# Altium PCB ui_layout-v1.1.PcbDoc
Units mil, origin at the board's own origin, x right, y up, seen from the top; angles counter-clockwise.
Board outline 3110 x 2130 mil, 4 copper layers (Power Plane, Signal Layer 1, Signal Layer 2, GND Plane), stack 63.189 mil thick; 56 components, 45 nets, 174 pads, 67 vias.
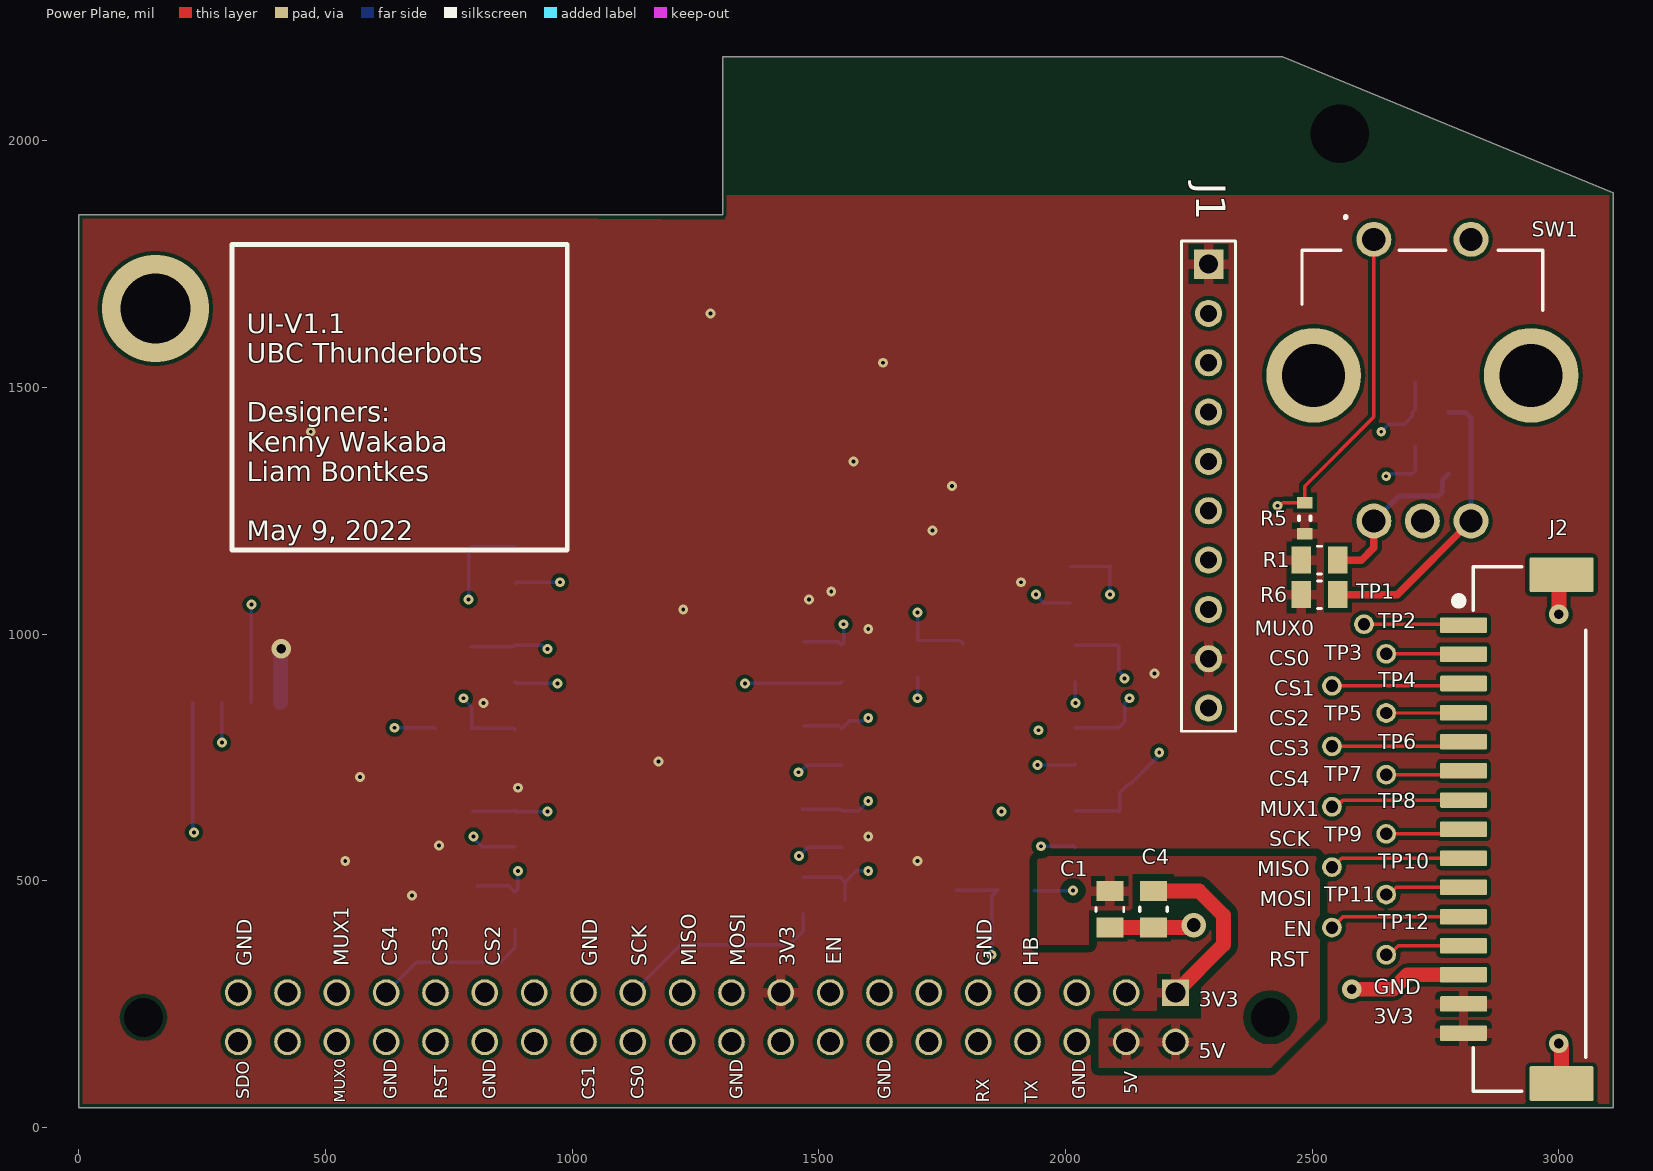
[diagram p0: Power Plane view]
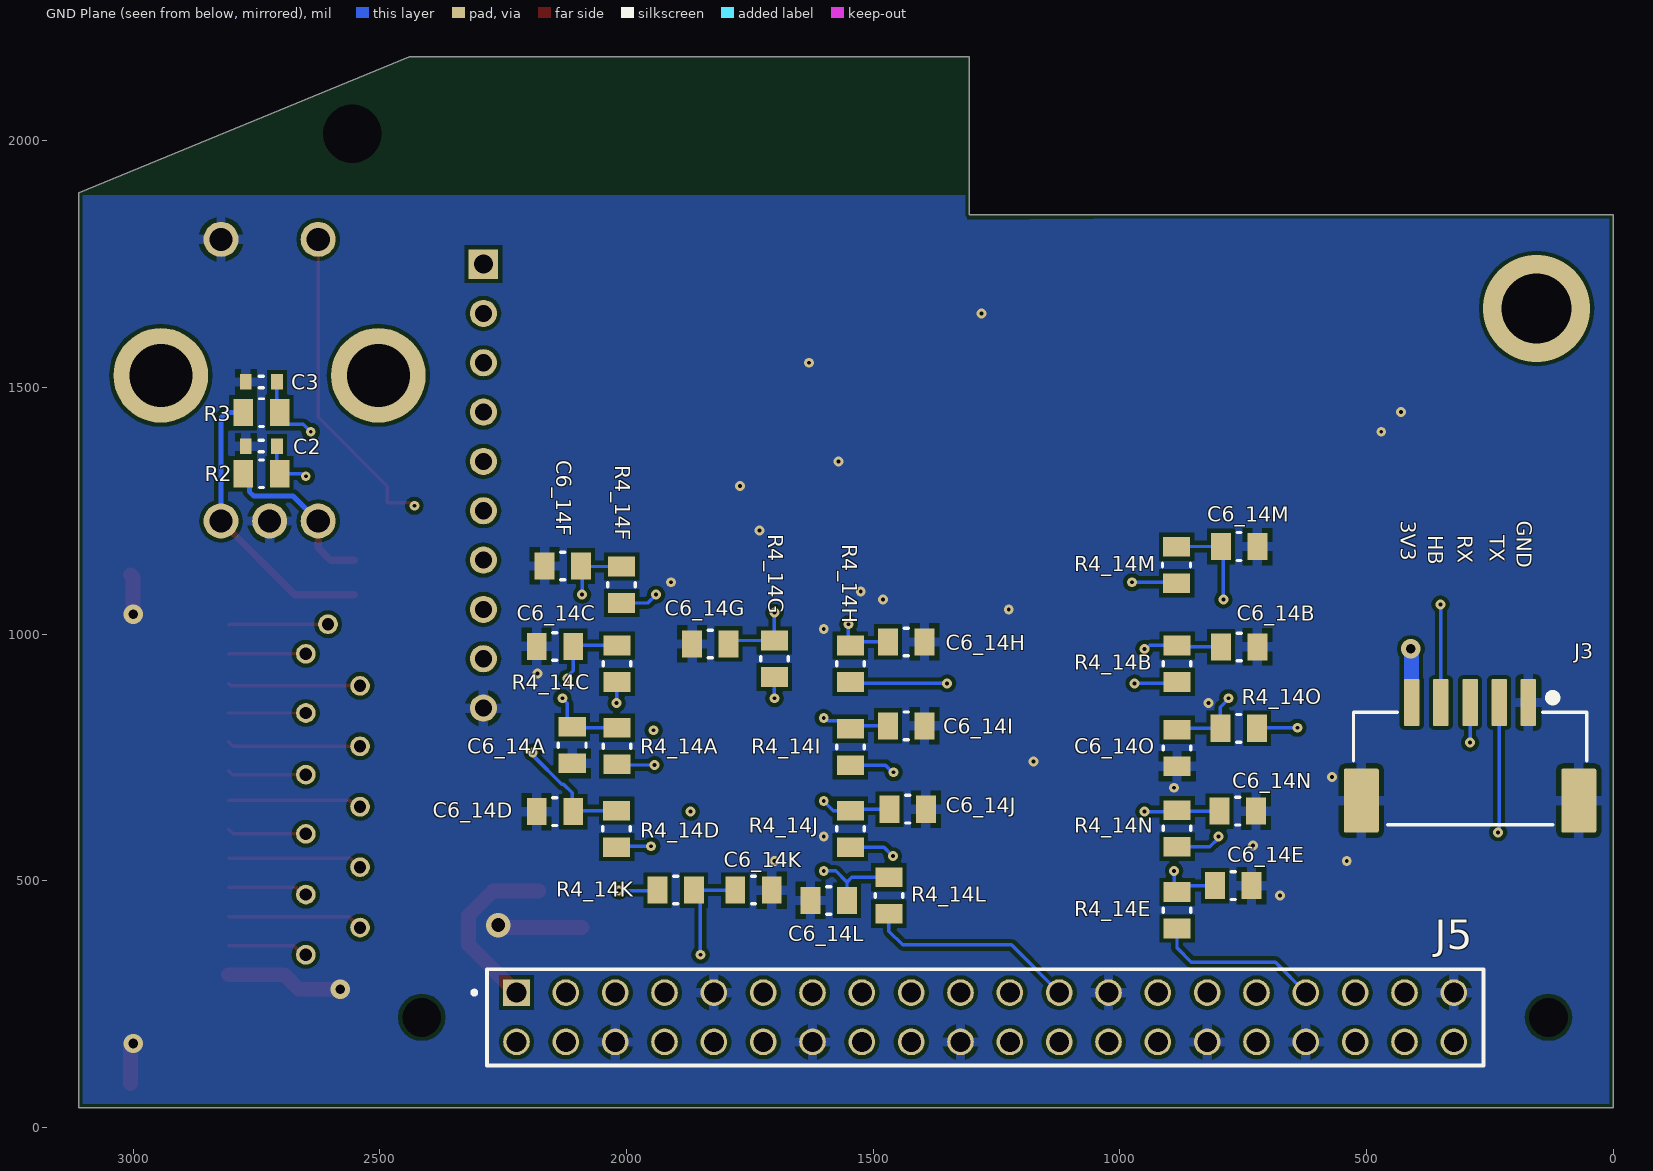
[diagram p1: GND Plane view, seen from below]
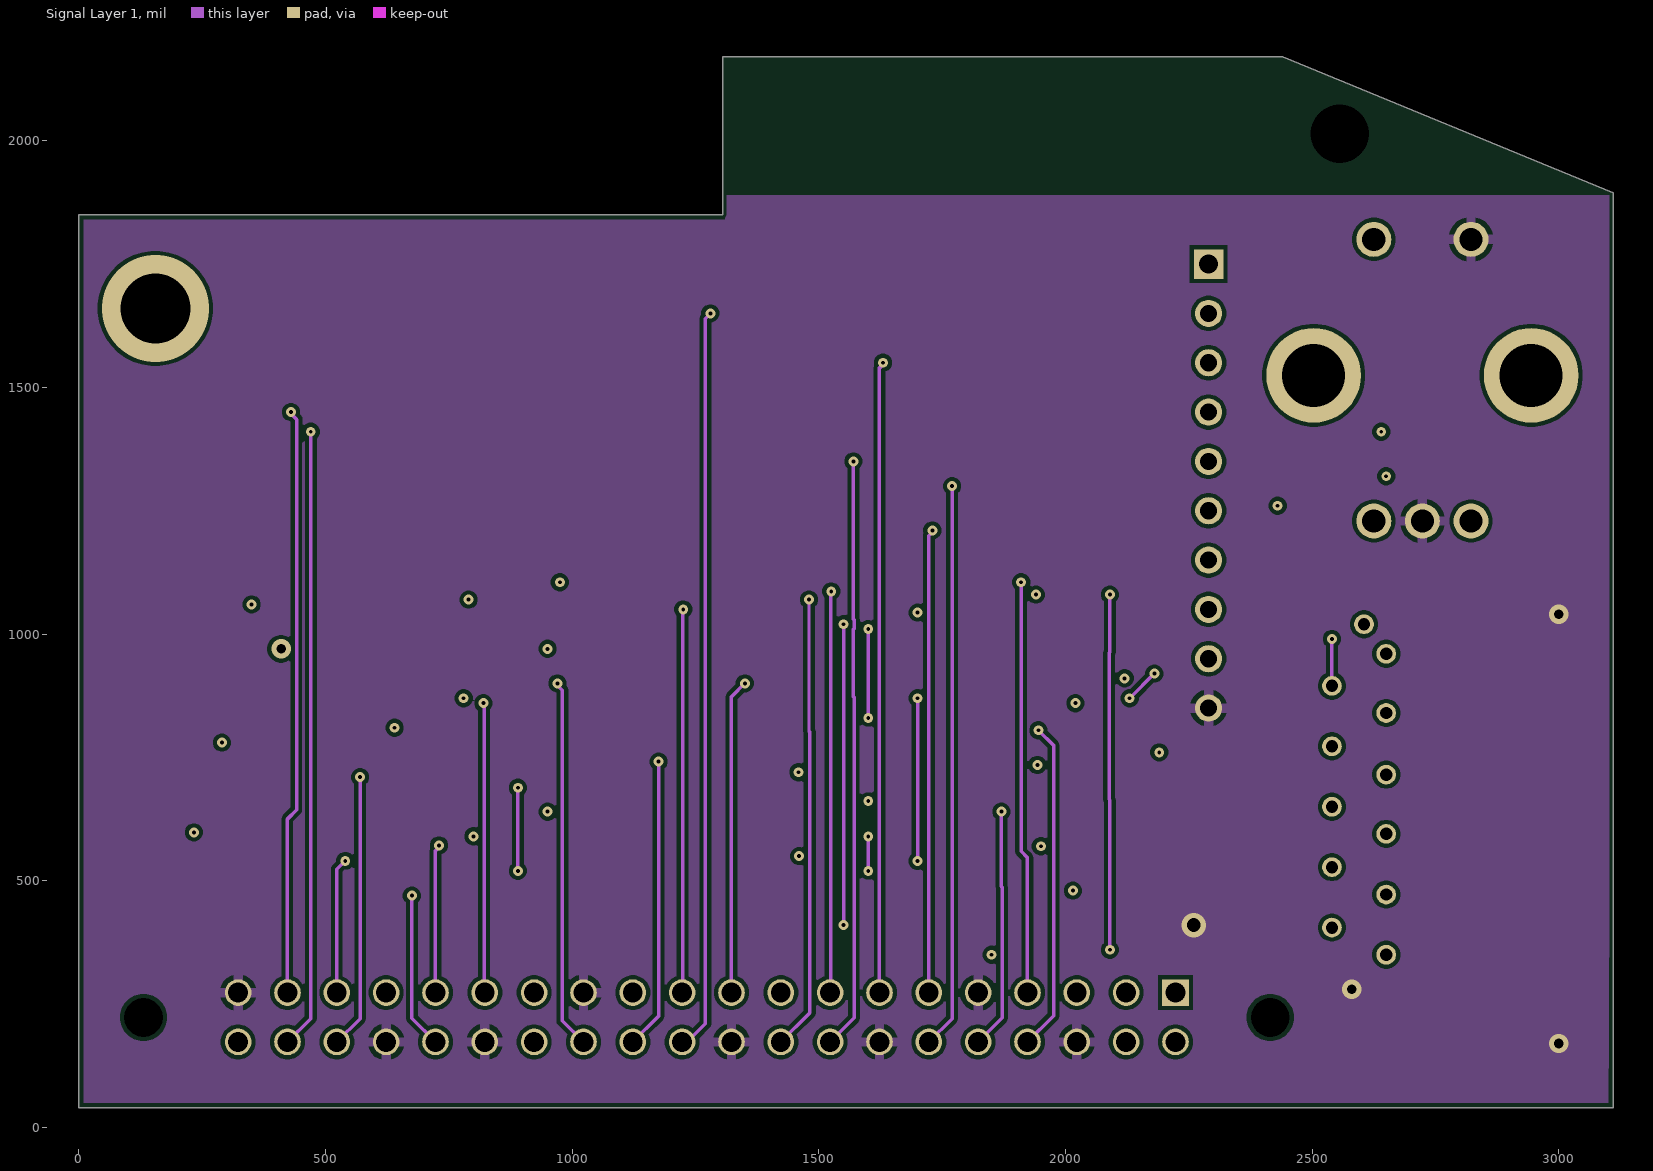
[diagram p2: Signal Layer 1]
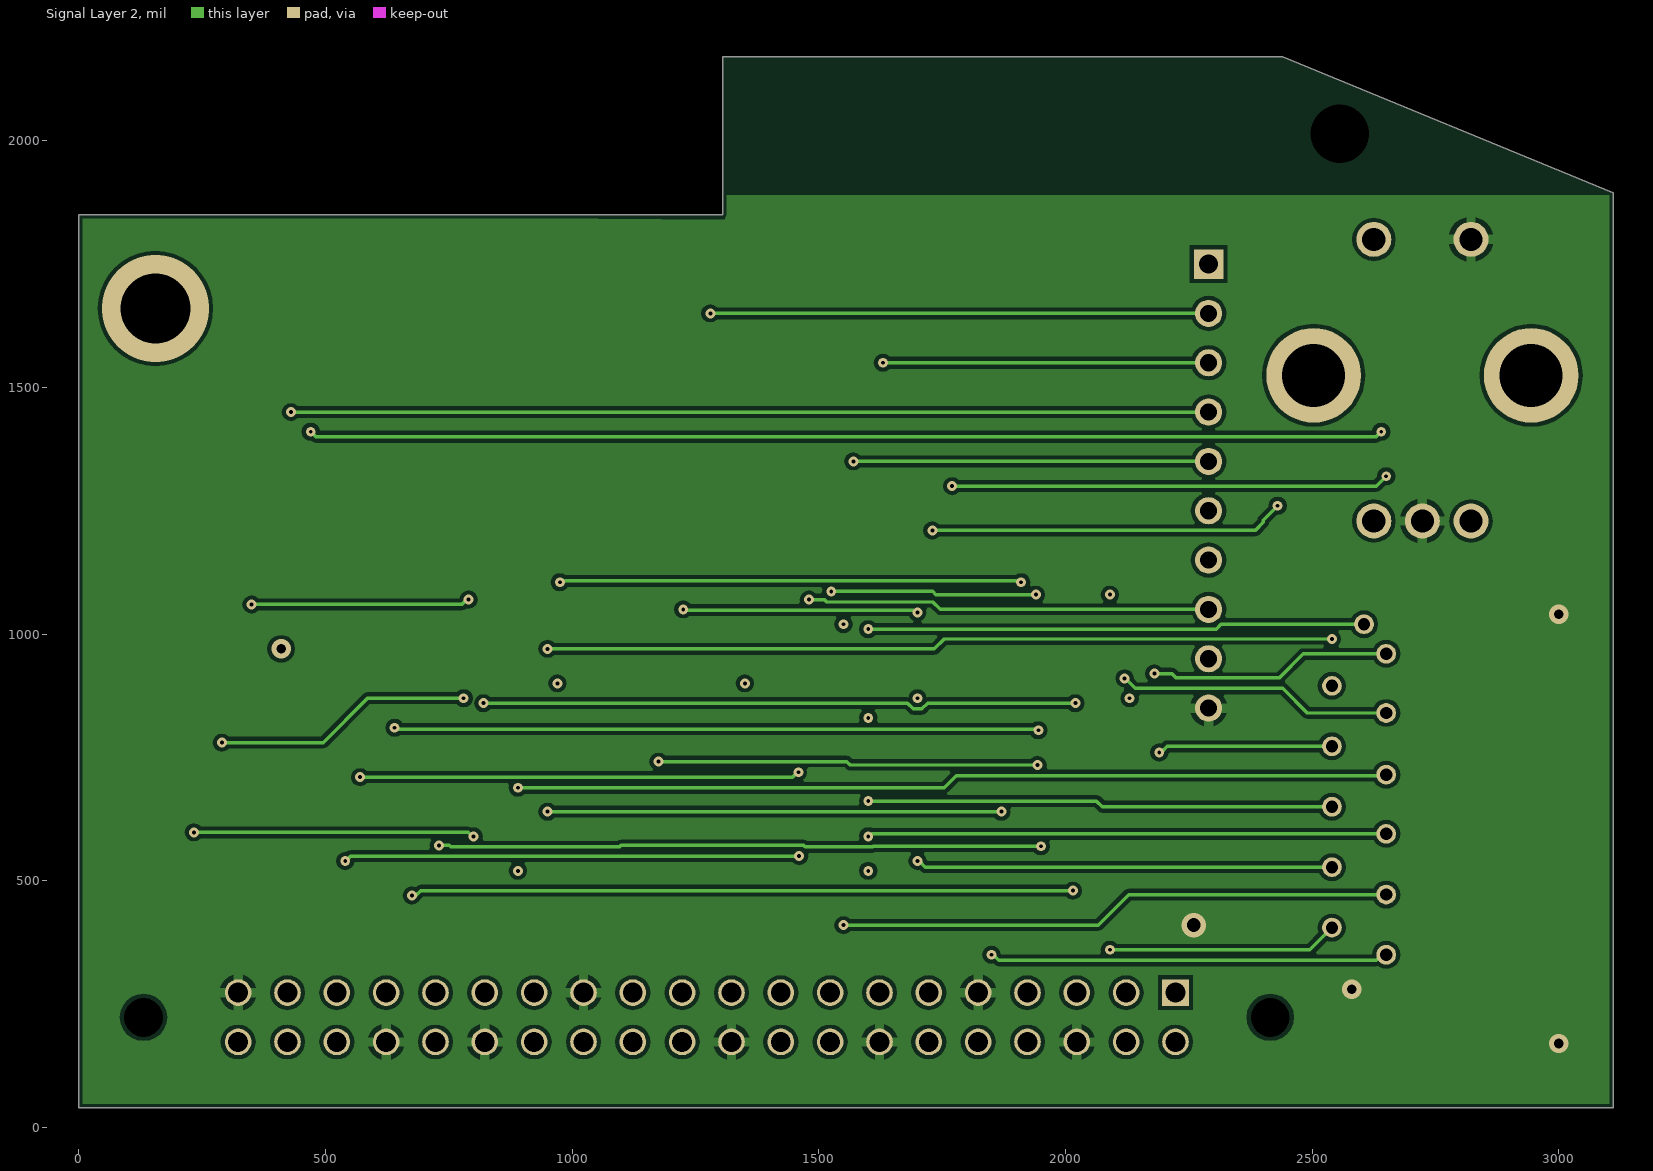
[diagram p3: Signal Layer 2]

## Layer stack, top to bottom
Top Mask: solder mask 0.5909, Solder Resist, Dk 3.8
Power Plane: signal copper 1.378
Dielectric 1: prepreg 3.937, 2313, Dk 4.05
Signal Layer 1: signal copper 1.378
Core: core 49.8031, FR-4, Dk 4.5
Signal Layer 2: signal copper 1.378
Dielectric 2: prepreg 3.937, 2313, Dk 4.05
GND Plane: signal copper 1.378
Bottom Mask: solder mask 0.5909, Solder Resist, Dk 3.8

## Board outline
1305,2170 1305,1850 0,1850 0,40 3110,40 3110,1895 2440,2170

## Design rules (kind name [scope] priority, off if disabled: settings)
BoardOutlineClearance [All] p1: gap=7.87 ignorepadtopadclearanceinfootprint=FALSE except(15.75: Arc-SplitBarrior Arc-SplitContinuation Track-SplitBarrior Track-SplitContinuation SMDPad-SplitBarrior SMDPad-SplitContinuation THPad-SplitBarrior THPad-SplitContinuation Via-SplitBarrior Via-SplitContinuation Fill-SplitBarrior Fill-SplitContinuation Poly-SplitBarrior Poly-SplitContinuation Region-SplitBarrior Region-SplitContinuation Text-SplitBarrior Text-SplitContinuation)
Clearance "JETSON_5V Polygon Clearance" [(InNet('JETSON_5V')) AND InPolygon] p1: gap=15 ignorepadtopadclearanceinfootprint=FALSE
Clearance "POWER_5V Polygon Clearance" [(InNet('POWER_5V')) AND InPolygon] p2: gap=20 ignorepadtopadclearanceinfootprint=TRUE
Clearance [All] p3: gap=8 ignorepadtopadclearanceinfootprint=FALSE
HoleSize [All] p1: absolutevalues=TRUE maxlimit=248.03 minlimit=7.87 maxpercent=80.000 minpercent=20.000
MinimumAnnularRing [All] p1: minimumring=3
MinimumSolderMaskSliver [All] p1: minsoldermaskwidth=3.94
PolygonConnect PolygonConnect_1 [All] p1: thpad.connectstyle=Relief thpad.reliefconductorwidth=20 thpad.reliefentries=4 thpad.polygonreliefangle="90 Angle" thpad.airgapwidth=10 smdpad.connectstyle=Relief smdpad.reliefconductorwidth=20 smdpad.reliefentries=4 smdpad.polygonreliefangle="90 Angle" smdpad.airgapwidth=10 via.connectstyle=Direct via.reliefconductorwidth=20 via.reliefentries=4 via.polygonreliefangle="90 Angle" via.airgapwidth=10
RoutingCorners [All] p1: cornerstyle=Round minsetback=100 maxsetback=100
RoutingVias [All] p1: holewidth=19.68 width=39.37 viastyle="Through Hole" minholewidth=7.87 minwidth=17.72 maxholewidth=39.37 maxwidth=78.74
SilkToSilkClearance [All] p1: silktosilkclearance=3.94
SilkToSolderMaskClearance [IsPad] p1: minsilkscreentomaskgap=3.94 clearancetoexposedcopper=TRUE
SolderMaskExpansion [All] p1: expansion=4 istentingtop=FALSE
Width [All] p1: maxlimit=100 minlimit=7 preferedwidth=15
25 further rules are at their usual default settings.

## Classes and differential pairs
component class FL_PWR_HRBT: C6_14M R4_14M
component class FL_MD_MUX_0: C6_14I R4_14I
component class FL_MD_RESET: C6_14K R4_14K
component class FL_MD_CS0: C6_14A R4_14A
component class FL_PWR_RX: C6_14N R4_14N
component class FL_MD_MUX_1: C6_14J R4_14J
component class FL_MD_CS1: C6_14B R4_14B
component class FL_MD_CS2: C6_14C R4_14C
component class U_jetson-nano: C1 C4 J4 J5
component class U_power: J3
component class U_motor-driver: J2 TP1 TP2 TP3 TP4 TP5 TP6 TP7 TP8 TP9 TP10 TP11 TP12
component class U_rotary-encoder: C2 C3 R1 R2 R3 R5 R6 SW1
component class U_display: J1
component class FL_MD_SCK: C6_14L R4_14L
component class FL_PWR_TX: C6_14O R4_14O
component class FL_MD_MOSI: C6_14H R4_14H
component class FL_MD_MISO: C6_14G R4_14G
component class FL_MD_EN: C6_14F R4_14F
component class FL_MD_CS4: C6_14E R4_14E
component class FL_MD_CS3: C6_14D R4_14D
channel class low-pass-filter: CTRL_EN_FILTER FL_MD_CS0 FL_MD_CS1 FL_MD_CS2 FL_MD_CS3 FL_MD_CS4 FL_MD_EN FL_MD_MISO FL_MD_MOSI FL_MD_MUX_0 FL_MD_MUX_1 FL_MD_RESET FL_MD_SCK FL_PWR_HRBT FL_PWR_RX FL_PWR_TX HEARTBEAT_FILTER RESET_FILTER SPI1_CS0_FILTER SPI1_CS1_FILTER SPI1_CS2_FILTER SPI1_CS3_FILTER SPI1_CS4_FILTER SPI1_CS5_FILTER SPI1_MISO_FILTER SPI1_MOSI_FILTER SPI1_SCK_FILTER UART2_RX_FILTER UART2_TX_FILTER

## Components (designator, comment, footprint, x,y, rotation, side; value= is the part's Value field where it differs from the comment)
C1 "0.10uF 25V" 0805 2090,442 r90 top value=0.1uF
C2 "0.010uF" 0603 2740,1381 r180 bottom
C3 "0.010uF" 0603 2740,1511 r180 bottom
C4 "0.10uF 25V" 0805 2178,442 r90 top value=0.1uF
C6_14A "330pF" 0805 2110,775 r90 bottom (schematic designator C6_14)
C6_14B "330pF" 0805 758,974 r0 bottom (schematic designator C6_14)
C6_14C "330pF" 0805 2145,975 r180 bottom (schematic designator C6_14)
C6_14D "330pF" 0805 2145,640 r180 bottom (schematic designator C6_14)
C6_14E "330pF" 0805 770,490 r0 bottom (schematic designator C6_14)
C6_14F "330pF" 0805 2129,1138 r180 bottom (schematic designator C6_14)
C6_14G "330pF" 0805 1830,980 r180 bottom (schematic designator C6_14)
C6_14H "330pF" 0805 1433,984 r0 bottom (schematic designator C6_14)
C6_14I "330pF" 0805 1433,814 r0 bottom (schematic designator C6_14)
C6_14J "330pF" 0805 1430,645 r0 bottom (schematic designator C6_14)
C6_14K "330pF" 0805 1742.5,481 r0 bottom (schematic designator C6_14)
C6_14L "330pF" 0805 1590,460 r180 bottom (schematic designator C6_14)
C6_14M "330pF" 0805 758,1177.5 r0 bottom (schematic designator C6_14)
C6_14N "330pF" 0805 761,641 r0 bottom (schematic designator C6_14)
C6_14O "330pF" 0805 884,769 r90 bottom (schematic designator C6_14)
J1 "CN LCD TFT 128X160 1.8in" "CN LCD TFT 128X160 1.8in" 2290,1750 r0 top
J2 "BM15B-ZESS-TBT(LF)(SN)" "JST ZE SMT 15POS" 2915,575 r90 top
J3 "BM05B-ZESS-TBT(LF)(SN)" "JST ZE SMT 5POS" 290,753 r180 bottom
J5 "CN HDR 40POS" "CN HDR 40POS 0.1 TH" 1272.83,223.23 r0 bottom
R1 "10k" 0805 2515,1150 r180 top
R2 "10k" 0805 2740,1325 r180 bottom
R3 "10k" 0805 2740,1449 r0 bottom
R4_14A "100" 0805 2019.18,773 r270 bottom (schematic designator R4_14)
R4_14B "100" 0805 884,940 r270 bottom (schematic designator R4_14)
R4_14C "100" 0805 2019.18,940 r270 bottom (schematic designator R4_14)
R4_14D "100" 0805 2020,605 r270 bottom (schematic designator R4_14)
R4_14E "100" 0805 884,440 r270 bottom (schematic designator R4_14)
R4_14F "100" 0805 2010,1100 r270 bottom (schematic designator R4_14)
R4_14G "100" 0805 1700,950 r270 bottom (schematic designator R4_14)
R4_14H "100" 0805 1546,940 r270 bottom (schematic designator R4_14)
R4_14I "100" 0805 1546,771 r270 bottom (schematic designator R4_14)
R4_14J "100" 0805 1546,605 r270 bottom (schematic designator R4_14)
R4_14K "100" 0805 1900,481 r0 bottom (schematic designator R4_14)
R4_14L "100" 0805 1468,470 r270 bottom (schematic designator R4_14)
R4_14M "100" 0805 885,1140 r270 bottom (schematic designator R4_14)
R4_14N "100" 0805 884,606 r270 bottom (schematic designator R4_14)
R4_14O "100" 0805 759,809 r180 bottom (schematic designator R4_14)
R5 "2k" 0603 2485,1235 r90 top
R6 "10k" 0805 2515,1080 r180 top
SW1 "PEC12R-4220F-S0024" PEC12R4220FS0024 2625,1800 r0 top
TP1 "Test Point (Via)" TP 2605,1020 r0 top
TP2 "Test Point (Via)" TP 2650,960 r90 top
TP3 "Test Point (Via)" TP 2540,895 r90 top
TP4 "Test Point (Via)" TP 2650,840 r90 top
TP5 "Test Point (Via)" TP 2540,772.5 r90 top
TP6 "Test Point (Via)" TP 2650,715 r90 top
TP7 "Test Point (Via)" TP 2540,650 r90 top
TP8 "Test Point (Via)" TP 2650,595 r90 top
TP9 "Test Point (Via)" TP 2540,527.5 r90 top
TP10 "Test Point (Via)" TP 2650,472 r90 top
TP11 "Test Point (Via)" TP 2540,405 r90 top
TP12 "Test Point (Via)" TP 2650,350 r90 top

## Footprints (in the part's own frame and the unit in brackets; to place one, negate y for a bottom-side part, rotate by r counter-clockwise, add the part's x,y. Pads: shape width x height; smd on the part's side, far side on the other; paste and mask are expansions set on the pad)
0603 [mm] "Chip Resistor, 2-Leads, Body 1.60x0.80mm, IPC High Density"
  rect 0.6x0.8 smd mask+0.1: 1(-0.8,0) 2(0.8,0)
  silkscreen extent -0.1,-0.3 0.1,0.3, body extent -0.8,-0.4 0.8,0.4, height 0.6
0805 [mil] "40 Position Header Connector 0.100\" (2.54mm) Through Hole"
  rect 40x55 smd: 1(-37,0) 2(37,0)
  silkscreen extent -4,-28 4,28, body extent -47,-28 47,28, height 24
"CN HDR 40POS 0.1 TH" [mm] "40 Position Header Connector 0.100\" (2.54mm) Through Hole"
  rect 1.37x1.37 hole 1.02: 01(24.13,-1.27)
  round 1.37 hole 1.02: 02(24.13,1.27) 03(21.59,-1.27) 04(21.59,1.27) 05(19.05,-1.27) 06(19.05,1.27) 07(16.51,-1.27) 08(16.51,1.27) 09(13.97,-1.27) 10(13.97,1.27) 11(11.43,-1.27) 12(11.43,1.27) 13(8.89,-1.27) 14(8.89,1.27) 15(6.35,-1.27) 16(6.35,1.27) 17(3.81,-1.27) 18(3.81,1.27) 19(1.27,-1.27) 20(1.27,1.27) 21(-1.27,-1.27) 22(-1.27,1.27) 23(-3.81,-1.27) 24(-3.81,1.27) 25(-6.35,-1.27) 26(-6.35,1.27) 27(-8.89,-1.27) 28(-8.89,1.27) 29(-11.43,-1.27) 30(-11.43,1.27) 31(-13.97,-1.27) 32(-13.97,1.27) 33(-16.51,-1.27) 34(-16.51,1.27) 35(-19.05,-1.27) 36(-19.05,1.27) 37(-21.59,-1.27) 38(-21.59,1.27) 39(-24.13,-1.27) 40(-24.13,1.27)
  silkscreen extent -25.66,-2.47 26.4,2.47
"CN LCD TFT 128X160 1.8in" [mil]
  rect 60x60 hole 38 mask+0: 1(0,0)
  round 55 hole 35 mask+0: 2(0,-100) 3(0,-200) 4(0,-300) 5(0,-400) 6(0,-500) 7(0,-600) 8(0,-700) 9(0,-800) 10(0,-900)
  silkscreen extent -55,-947 55,47, body extent -50,-955 50,45, height 90
"JST ZE SMT 5POS" [mm] "5 POS HDR JST ZE"
  rrect10% 1.8x3.3 smd: 0(-5.6,-2.3) 0(5.6,-2.3)
  rrect10% 0.8x2.4 smd: 1(3,2.75) 2(1.5,2.75) 3(0,2.75) 4(-1.5,2.75) 5(-3,2.75)
  silkscreen extent -6,-3.55 6,3, body extent -6,-2.9 6,4.1, height 7.51
"JST ZE SMT 15POS" [mm] "15 POS HDR JST ZE"
  rrect10% 1.8x3.3 smd: 0(-12.35,-2.3) 0(13.85,-2.3)
  rrect10% 0.8x2.4 smd: 1(11.25,2.75) 2(9.75,2.75) 3(8.25,2.75) 4(6.75,2.75) 5(5.25,2.75) 6(3.75,2.75) 7(2.25,2.75) 8(0.75,2.75) 9(-0.75,2.75) 10(-2.25,2.75) 11(-3.75,2.75) 12(-5.25,2.75) 13(-6.75,2.75) 14(-8.25,2.75) 15(-9.75,2.75)
  silkscreen extent -12.75,-3.55 14.26,3, body extent -12.75,-3.55 14.25,3.45, height 7.6
PEC12R4220FS0024 [mm]
  round 1.8 hole 1.2: 1(0,0) 2(5,0) A1(0,-14.5) B1(5,-14.5) C1(2.5,-14.5)
  round 4.875 hole 3.25: MH1(8.1,-7) MH2(-3.1,-7)
  silkscreen extent -3.7,-3.65 8.7,1.2, body extent -4.61,-15 9.62,0.5, height 20.1
TP [mil] "Test point (40mil Standard)"
  round 40 hole 25: 1(0,0)

## Part data
C1 C4: library part "CAP 0.10uF 25V", "CAP CER 0.10UF 25V X7R 0805", Operating Temperature="-55°C ~ 125°C", Rating=25V, Temperature Coefficient=X7R, Tolerance=10%, Part Number="CAP 0.10uF 25V"
C2 C3: library part "CAP 0.010uF 16V", "CAP CER 0.010UF 16V X5R 0603/0805", Operating Temperature="-55°C ~ 85°C", Package=0603/0805, Rating=16V, Temperature Coefficient=X5R, Tolerance=10%, Part Number="CAP 0.010uF 16V"
C6_14A C6_14B C6_14C C6_14D C6_14E C6_14F C6_14G C6_14H C6_14I C6_14J C6_14K C6_14L C6_14M C6_14N C6_14O: library part "CAP 330pF 16V", "CAP CER 330PF 16V X5R 0603/0805", Operating Temperature="-55°C ~ 85°C", Package=0603/0805, Rating=16V, Temperature Coefficient=X5R, Tolerance=10%, Part Number="CAP 330pF 16V"
J1: "Graphic LCD Display Module Transmissive Red, Green, Blue (RGB) TFT - Color SPI 1.8\" (45.72mm) 128 x 160", Manufacturer Part Number 1=358, Supplier Part Number 1=1528-1536-ND, Part Number="CN LCD TFT 128X160 1.8in", Pin Count=10, Supplier 1=Digi-Key, Supplier URL 1=https://www.digikey.ca/en/products/detail/adafruit-industries-llc/358/5801368
J2: library part "CN 15POS JST ZE SMT", "CONN HEADER VERT SMD 15POS ZE", Supplier Part Number 1=455-4211-1-ND, Manufacturer Part Number 1=BM15B-ZESS-TBT(LF)(SN), Part Number="CN 15POS JST ZE SMT", Pin Count=15, Supplier 1=Digi-Key, Supplier URL 1=https://www.digikey.ca/en/products/detail/jst-sales-america-inc/BM15B-ZESS-TBT-LF-SN/1886999?s=N4IgTCBcDaIEIFkCMBWOBaAWgUQMq-QBU5CAKAGQDEBKU3AOWpAF0BfIA
J3: library part "CN 5POS JST ZE SMT", "CONN HEADER VERT SMD 5POS ZE", Supplier Part Number 1=455-2383-1-ND, Manufacturer Part Number 1=BM05B-ZESS-TBT(LF)(SN), Part Number="CN 5POS JST ZE SMT", Pin Count=5, Supplier 1=Digi-Key, Supplier URL 1=https://www.digikey.ca/en/products/detail/jst-sales-america-inc/BM05B-ZESS-TBT-LF-SN/1886989?s=N4IgTCBcDaIEIFkAMBWOBaAWgUQMq-QBU5CAKAGQDEBKU3AOWpAF0BfIA
J5: "40 Position Header Connector", Supplier Part Number 1=S6104-ND, Part Number="CN HDR 40POS", Pin Count=40, Supplier 1=Digi-Key, Supplier URL 1=https://www.digikey.ca/en/products/detail/sullins-connector-solutions/PPTC202LFBN-RC/807240?s=N4IgTCBcDaIMoDYCMAGALAWgHIBEQF0BfIA
R1 R2 R3 R6: library part "RES 10k 1/8W 1%", "RES SMD 10K OHM 1% 1/8W 0805", Manufacturer Part Number 1=ERJ-H3GJ103V, Manufacturer Part Number 2=RMCF0805JT10K0, Package=0805, Power (Watts)=0.125W, Supplier Part Number 1=10-ERJ-H3GJ103VCT-ND, Tolerance=5%, Part Number="RES 10k 1/8W 1%", Supplier 1=Digi-Key, Supplier 2=Digi-Key, Supplier Part Number 2=RMCF0805JT10K0CT-ND, Supplier URL 1=https://www.digikey.ca/en/products/detail/panasonic-electronic-components/ERJ-H3GJ103V/13877876?s=N4IgTCBcDaIIwAYC0BRASgKSQCQMwHENFcA1AYQBUkA5AERAF0BfIA, Supplier URL 2=https://www.digikey.ca/en/products/detail/stackpole-electronics-inc/RMCF0805JT10K0/1757762?s=N4IgTCBcDaIEoFkDCAxADADjQVgFIBUBGNAaTSXxAF0BfIA, Tolerance 2=5%
R4_14A R4_14B R4_14C R4_14D R4_14E R4_14F R4_14G R4_14H R4_14I R4_14J R4_14K R4_14L R4_14M R4_14N R4_14O: library part "RES 100.0 1/8W 5%", "RES SMD 100 OHM 5% 1/8W 0805", Manufacturer Part Number 1=RK73B1JRTTD101J, Manufacturer Part Number 2=RMCF0805JT100R, Package=0805, Power (Watts)=0.125W, Supplier Part Number 1=2019-RK73B1JRTTD101JCT-ND, Tolerance=5%, Part Number="RES 100.0 1/8W 5%", Supplier 1=Digi-Key, Supplier 2=Digi-Key, Supplier Part Number 2=RMCF0805JT100RCT-ND, Supplier URL 1=https://www.digikey.ca/en/products/detail/koa-speer-electronics-inc/RK73B1JRTTD101J/12156165?s=N4IgTCBcDaIEoGkDsBmAQgRgFJwCq4BEMAGbAYVxAF0BfIA, Supplier URL 2=https://www.digikey.ca/en/products/detail/stackpole-electronics-inc/RMCF0805JT100R/1757756?s=N4IgTCBcDaIEoFkDCAxADADjQVgFIBUBGNNOJfEAXQF8g, Tolerance 2=5%
R5: library part "RES 2k 1/8W", "RES SMD 2K OHM 5% 1/8W 0805", Package=0805, Power (Watts)=0.125W, Tolerance=5%, Part Number="RES 2k 1/8W"
SW1: library part PEC12R4220FS0024, "Rotary Encoder", Manufacturer_Name=Bourns, Mouser Part Number=652-PEC12R-4220F-S24, Supplier Part Number 1=PEC12R-4220F-S0024-ND, Arrow Part Number=PEC12R-4220F-S0024, Arrow Price/Stock=https://www.arrow.com/en/products/pec12r-4220f-s0024/bourns, Datasheet Link=https://componentsearchengine.com/Datasheets/5/PEC12R-4220F-S0024.pdf, Height=20mm, Manufacturer_Part_Number=PEC12R-4220F-S0024, Mouser Price/Stock=https://www.mouser.co.uk/ProductDetail/Bourns/PEC12R-4220F-S0024?qs=Zq5ylnUbLm7u%2FuPQvUoR4Q%3D%3D, Part Number=PEC12R4220FS0024, Supplier 1=Digi-key, Supplier URL 1=https://www.digikey.ca/en/products/detail/bourns-inc/PEC12R-4220F-S0024/4499653
TP1 TP2 TP3 TP4 TP5 TP6 TP7 TP8 TP9 TP10 TP11 TP12: Part Number="Test Point (Via)"

## Free pads (board coordinates)
  round 60 hole 78.74: 1(131,223) 1(2415,223)
  round 60 hole 118.11: 1(2556,2014)

## Via types
v1: diameter 20, hole 7.87, Power Plane to GND Plane, 58 vias
v2: diameter 39.37, hole 19.68, Power Plane to GND Plane, 4 vias
v3: diameter 20, hole 7.87, Signal Layer 1 to Signal Layer 2, 3 vias
v4: diameter 50, hole 28, Power Plane to GND Plane, 1 vias
v5: diameter 216.54, hole 141.73, Power Plane to GND Plane, 1 vias

## Nets (pads, with @x,y where several pads share a name; then routed paths per layer and width w, separated by ;. In a path a pad name is that pad's centre, name@x,y a point inside that pad or via, vN(x,y) a via of type N, cw(c..) or ccw(c..) an arc to the next point about the centre after c; other vN are vias at no path point)
A_SRC: C2.2 J5.12 R2.2 | length 2147.9
  Signal Layer 1 w7: J5.12 1770,220.39 v1(1770,1300)
  Signal Layer 2 w7: v1(1770,1300) 2630,1300 v1(2650,1320)
  GND Plane w7: v1(2650,1320) 2653.52,1320 2658.52,1325 R2.2 2708.5,1330.5 C2.2
B_SRC: C3.2 J5.38 R3.1 | length 3582.4
  Signal Layer 1 w7: J5.38 470,220.39 v1(470,1410)
  Signal Layer 2 w7: v1(470,1410) 470.6,1410 480.6,1400 2629.4,1400 2639.4,1410 v1(2640,1410)
  GND Plane w7: v1(2640,1410) 2655,1425 2686.5,1425 2703,1441.5 R3.1 2708.5,1454.5 C3.2
CARD_CS: J1.6
CS_CTRL_0: C6_14A.2 J2.2 R4_14A.1 TP2.1 | length 879.9
  Power Plane w7: TP2.1 2805.59,960 J2.2
  Signal Layer 1 w7: v1(2130,870) v1(2180,920)
  Signal Layer 2 w7: v1(2180,920) 2215.48,920 2224.48,911 2432.96,911 2481.96,960 TP2.1
  GND Plane w7: R4_14A.1 2108,810 2120,822 2120,859.4 2130,869.4 v1(2130,870)
CS_CTRL_1: C6_14B.2 J2.3 R4_14B.1 TP3.1 | length 2121.1
  Power Plane w7: TP3.1 2801.93,895 J2.3
  Signal Layer 1 w7: TP3.1 v3(2540,990)
  Signal Layer 2 w7: v1(950,970) 1734.26,970 1754.26,990 v3(2540,990)
  GND Plane w7: C6_14B.2 881,974 R4_14B.1 939.48,977 946.48,970 v1(950,970)
CS_CTRL_2: C6_14C.2 J2.4 R4_14C.1 TP4.1 | length 875.7
  Power Plane w7: TP4.1 2805.98,840 J2.4
  Signal Layer 2 w7: v1(2119.8,910.2) 2120.79,910.2 2140.99,890 2440,890 2490,840 TP4.1
  GND Plane w7: R4_14C.1 2106,977 C6_14C.2 2108,925.52 2119.8,913.72 v1(2119.8,910.2)
CS_CTRL_3: C6_14D.2 J2.5 R4_14D.1 TP5.1 | length 870.7
  Power Plane w7: TP5.1 2797.54,772.5 J2.5
  Signal Layer 2 w7: v1(2190,760) 2193.52,760 2206.02,772.5 TP5.1
  GND Plane w7: R4_14D.1 2106,642 C6_14D.2 2110,642 2110,678 2127.62,695.62 2131.38,695.62 2187.51,751.75 2187.51,757.51 v1(2190,760)
CS_CTRL_4: C6_14E.2 J2.6 R4_14E.1 TP6.1 | length 2227.2
  Power Plane w7: TP6.1 2799.09,715 J2.6
  Signal Layer 1 w7: v1(890,520) v1(890,688.5)
  Signal Layer 2 w7: v1(890,688.5) 1754.04,688.5 1778.61,713.07 2648.07,713.07 TP6.1
  GND Plane w7: C6_14E.2 871,490 R4_14E.1 890,483 v1(890,520)
D/C: J1.7
DRV_EN: C6_14F.2 J2.11 R4_14F.1 TP11.1 | length 1605.7
  Power Plane w7: TP11.1 2562.36,427.36 J2.11
  Signal Layer 1 w7: v3(2090,360) 2090,663.15 2088.5,664.65 2088.5,961.79 2090,963.29 v1(2090,1080)
  Signal Layer 2 w7: v3(2090,360) 2495,360 TP11.1
  GND Plane w7: R4_14F.1 C6_14F.2@2091,1137 ; v1(2090,1080) 2090,1136 C6_14F.2@2091,1137 ; C6_14F.2 C6_14F.2@2091,1137
DS_MISO: J1.2 J5.22 | length 2516.5
  Signal Layer 1 w7: J5.22 1233.23,173.23 1270,210 1270,1639.4 1280,1649.4 v1(1280,1650)
  Signal Layer 2 w7: v1(1280,1650) J1.2
DS_MOSI: J1.4 J5.37 | length 3049.3
  Signal Layer 1 w7: J5.37 422.83,625.16 441.5,643.82 441.5,1434.98 430,1446.48 v1(430,1450)
  Signal Layer 2 w7: v1(430,1450) J1.4
DS_RESET: J1.8 J5.18 | length 1740
  Signal Layer 1 w7: J5.18 1481.5,231.89 1481.5,801.79 1480,803.29 v1(1480,1070)
  Signal Layer 2 w7: v1(1480,1070) 1511.09,1070 1516.09,1065 1730.78,1065 1745.78,1050 J1.8
DS_SCK: J1.3 J5.13 | length 1941.2
  Signal Layer 1 w7: J5.13 1622.83,1539.4 1630,1546.57 v1(1630,1550)
  Signal Layer 2 w7: v1(1630,1550) J1.3
  GND Plane w7: J1.3@2288,1551 J1.3@2289,1552
DS_TFT_CS: J1.5 J5.16 | length 1918.8
  Signal Layer 1 w7: J5.16 1571.5,221.89 1571.5,871.79 1570,873.29 1570,1009.59 1571.5,1011.09 1571.5,1028.91 1570,1030.41 v1(1570,1350)
  Signal Layer 2 w7: v1(1570,1350) J1.5
HRBT: C6_14M.2 J3.4 R4_14M.1 | length 843
  Signal Layer 2 w7: v1(350,1060) 776.48,1060 786.48,1070 v1(790,1070)
  GND Plane w7: J3.4 349.06,1059.06 v1(350,1060) ; v1(790,1070) 790,1172.5 C6_14M.2 884.5,1177.5 R4_14M.1
JETSON_3V3: C4.2 J1.1 J1.9 J2.14 J2.15 J3.5 J5.01 J5.17 R1.2 R5.1 R6.2 | length 468.8
  Power Plane w30: C4.2 2271,479 2320,430 2320,370.39 J5.01
  GND Plane w30: J3.5 408.86,862.02 408.86,968.86 v2(410,970)
JETSON_5V: C1.2 J5.02 J5.04
JETSON_GND: C1.1 C2.1 C3.1 C4.1 C6_14A.1 C6_14B.1 C6_14C.1 C6_14D.1 C6_14E.1 C6_14F.1 C6_14G.1 C6_14H.1 C6_14I.1 C6_14J.1 C6_14K.1 C6_14L.1 C6_14M.1 C6_14N.1 C6_14O.1 J1.10 J2.0 J2.13 J3.0 J3.1 J5.06 J5.09 J5.14 J5.20 J5.25 J5.30 J5.34 J5.39 SW1.2 SW1.C1 | length 577
  Power Plane w30: C1.1 2249.59,405 2254.59,410 v4(2260,410) ; v2(2580,280) 2663.97,280 2693.22,309.25 J2.13 ; v2(3000,170) 3000,167.46 3005.55,161.91 J2.0@3005.55,88.78 ; v2(3000,1040) 3000,1114.72 J2.0@3005.55,1120.28
MD_CS_CTRL_0: J5.24 R4_14A.2 | length 1437.5
  Signal Layer 1 w7: J5.24 1175,225.39 v1(1175,741.5)
  Signal Layer 2 w7: v1(1175,741.5) 1556.83,741.5 1563.76,734.57 v1(1943.11,734.57)
  GND Plane w7: v1(1943.11,734.57) 2017.75,734.57 R4_14A.2
MD_CS_CTRL_1: J5.26 R4_14B.2 | length 835.9
  Signal Layer 1 w7: v1(970,900) 970,896.48 980,886.48 980,216.06 J5.26
  GND Plane w7: R4_14B.2 887,900 v1(970,900)
MD_CS_CTRL_2: J5.29 R4_14C.2 | length 1840.8
  Signal Layer 1 w7: v1(820,860) 821.42,858.58 821.42,274.64 J5.29
  Signal Layer 2 w7: v1(820,860) 1679.59,860 1691.09,848.5 1708.91,848.5 1720.41,860 v1(2020,860)
  GND Plane w7: R4_14C.2 2020,902.18 v1(2020,860)
MD_CS_CTRL_3: J5.31 R4_14D.2 | length 1596.4
  Signal Layer 1 w7: J5.31 722.83,560.82 730,567.98 v1(730,571.5)
  Signal Layer 2 w7: v1(730,571.5) 751,571.5 754,568.5 1095.96,568.5 1098.96,571.5 1468.91,571.5 1471.91,568.5 1608.91,568.5 1610.41,570 v1(1950,570)
  GND Plane w7: v1(1950,570) 2018,570 R4_14D.2
MD_CS_CTRL_4: J5.33 R4_14E.2 | length 337.8
  GND Plane w7: J5.33 684.42,334.82 854.82,334.82 884,364 R4_14E.2
MD_DRV_EN: J5.15 R4_14F.2 | length 1308.9
  Signal Layer 1 w7: J5.15 1523.92,274.31 1523.92,1085.42 v1(1525,1086.5)
  Signal Layer 2 w7: v1(1525,1086.5) 1730.49,1086.5 1736.99,1080 v1(1940,1080)
  GND Plane w7: v1(1940,1080) 1957,1063 R4_14F.2
MD_MISO: C6_14G.2 J5.21 R4_14G.1 | length 1407.8
  Signal Layer 1 w7: J5.21 1223.92,274.31 1223.92,1048.92 v1(1225,1050)
  Signal Layer 2 w7: v1(1225,1050) 1226.5,1048.5 1691.48,1048.5 1696.48,1043.5 v1(1700,1043.5)
  GND Plane w7: v1(1700,1043.5) R4_14G.1 1786,987 C6_14G.2
MD_MISO_SRC: J2.9 R4_14G.2 TP9.1 | length 1492.4
  Power Plane w7: TP9.1 2541.39,527.5 2559.36,545.47 J2.9
  Signal Layer 1 w7: v1(1700,540) v1(1700,870)
  Signal Layer 2 w7: v1(1700,540) 1703.52,540 1716.02,527.5 TP9.1
  GND Plane w7: v1(1700,870) R4_14G.2
MD_MOSI: J5.19 R4_14H.2 | length 835.3
  Signal Layer 1 w7: J5.19 1322.83,872.83 v1(1350,900)
  GND Plane w7: v1(1350,900) 1543,900 R4_14H.2
MD_MOSI_DST: C6_14H.2 J2.10 R4_14H.1 TP10.1 | length 2021.9
  Power Plane w7: TP10.1 2656.18,472 2670.6,486.42 J2.10
  Signal Layer 1 w7: v3(1550,410) v1(1550,1020)
  Signal Layer 2 w7: v3(1550,410) 2066.29,410 2128.29,472 TP10.1
  GND Plane w7: C6_14H.2 1539,984 R4_14H.1 1550,981 v1(1550,1020)
MD_MUX_SEL_0: J5.36 R4_14I.2 | length 1542.2
  Signal Layer 1 w7: J5.36 570,220.39 v1(570,710)
  Signal Layer 2 w7: v1(570,710) 1446.48,710 1456.48,720 v1(1458.5,720)
  GND Plane w7: v1(1458.5,720) 1460.99,720 1474.99,734 R4_14I.2
MD_MUX_SEL_0_DST: C6_14I.2 J2.1 R4_14I.1 TP1.1 | length 1533.3
  Power Plane w7: TP1.1 2804.65,1020 J2.1
  Signal Layer 1 w7: v1(1600,830) v1(1600,1010)
  Signal Layer 2 w7: v1(1600,1010) 2305.15,1010 2315.15,1020 TP1.1
  GND Plane w7: C6_14I.2 1540,814 R4_14I.1 1562.5,824.5 1590.98,824.5 1596.48,830 v1(1600,830)
MD_MUX_SEL_1: J5.35 R4_14J.2 | length 1291.7
  Signal Layer 1 w7: J5.35 522.83,523.22 539.61,540 v1(540,540)
  Signal Layer 2 w7: v1(540,540) 540.6,540 550.6,550 v1(1460,550)
  GND Plane w7: v1(1460,550) 1478,568 R4_14J.2
MD_MUX_SEL_1_DST: C6_14J.2 J2.7 R4_14J.1 TP7.1 | length 1359.4
  Power Plane w7: TP7.1 2548.93,650 2562.51,663.58 J2.7
  Signal Layer 2 w7: v1(1600,661.5) 2062.79,661.5 2074.29,650 TP7.1
  GND Plane w7: C6_14J.2 1543,645 R4_14J.1 1580.5,642 v1(1600,661.5)
MD_RESET: J5.32 R4_14K.2 | length 1739.1
  Signal Layer 1 w7: v1(675,470) 675,221.06 J5.32
  Signal Layer 2 w7: v1(675,470) 682.95,470 692.95,480 v1(2015,480)
  GND Plane w7: R4_14K.2 1938,480 v1(2015,480)
MD_RST_DST: C6_14K.2 J2.12 R4_14K.1 TP12.1 | length 1193.7
  Power Plane w7: TP12.1 2656.52,350 2674.83,368.31 J2.12
  Signal Layer 2 w7: v1(1850,350) 1853.52,350 1865.02,338.5 2629.57,338.5 2641.07,350 TP12.1
  GND Plane w7: C6_14K.2 R4_14K.1 1850,468 v1(1850,350)
MD_SCK: J5.23 R4_14L.2 | length 431.8
  GND Plane w7: J5.23 1219.61,370 1440,370 1468,398 R4_14L.2
MD_SCK_DST: C6_14L.2 J2.8 R4_14L.1 TP8.1 | length 1465.4
  Power Plane w7: TP8.1 2797.2,595 J2.8
  Signal Layer 1 w7: v1(1600,520) v1(1600,590)
  Signal Layer 2 w7: v1(1600,590) 1603.52,590 1608.52,595 TP8.1
  GND Plane w7: R4_14L.1 1543,507 1553,497 ; C6_14L.2 1553,467.5 1553,473 1553,497 ; v1(1600,520) 1576,520 1553,497
NetR1_1: R1.1 R2.1 SW1.A1 | length 343
  Power Plane w15: R1.1 2600,1150 2625,1175 SW1.A1
  GND Plane w10: SW1.A1 2675.87,1280 2755.65,1280 2764.47,1288.82 2764.47,1312.47 R2.1
NetR3_2: R3.2 R6.1 SW1.B1 | length 590
  Power Plane w15: R6.1 2672.72,1080 SW1.B1
  GND Plane w10: R3.2 2811,1449 2821.85,1438.15 SW1.B1
PB_SRC: J5.11 R5.2 SW1.1 | length 2315.6
  Power Plane w7: v1(2430,1260) 2433.52,1260 2440.01,1266.5 R5.2 2485,1300 2625,1440 SW1.1
  Signal Layer 1 w7: J5.11 1722.83,1199.32 1730,1206.48 v1(1730,1210)
  Signal Layer 2 w7: v1(1730,1210) 2384.19,1210 2400.85,1226.66 2400.85,1230.85 v1(2430,1260)
  GND Plane w7: SW1.1@2622.49,1797.49 SW1.1
PWR_HRBT: J5.07 R4_14M.2 | length 1865.4
  Signal Layer 1 w7: v1(1910,1105) 1910,559.4 1922.83,546.57 J5.07
  Signal Layer 2 w7: v1(975,1105) 977.49,1107.49 985.09,1107.49 985.6,1108 1899.4,1108 1899.91,1107.49 1907.51,1107.49 v1(1910,1105)
  GND Plane w7: R4_14M.2 887,1105 v1(975,1105)
PWR_RX: C6_14N.2 J5.10 R4_14N.1 | length 1561.6
  Signal Layer 1 w7: J5.10 1871.5,221.89 1871.5,486.79 1870,488.29 v1(1870,640)
  Signal Layer 2 w7: v1(950,640) v1(1870,640)
  GND Plane w7: C6_14N.2 882,641 R4_14N.1 887,640 v1(950,640)
PWR_RX_SRC: J3.2 R4_14N.2 | length 929.1
  Signal Layer 2 w7: v1(233.19,598) 789.32,598 797.32,590 v1(799.92,590)
  GND Plane w7: J3.2 230.94,600.25 v1(233.19,598) ; v1(799.92,590) 799.92,586.48 817.4,569 R4_14N.2
PWR_TX: J5.08 R4_14O.2 | length 2055.9
  Signal Layer 1 w7: J5.08 1975.79,226.18 1975.79,774.21 v1(1945,805)
  Signal Layer 2 w7: v1(640,810) 642.5,807.5 1942.5,807.5 v1(1945,805)
  GND Plane w7: v1(640,810) 721,810 R4_14O.2
PWR_TX_DST: C6_14O.2 J3.3 R4_14O.1 | length 765.4
  Signal Layer 2 w7: v1(290,780) 495,780 585,870 v1(780,870)
  GND Plane w7: v1(290,780) J3.3 ; v1(780,870) 780,868.06 796,852.06 R4_14O.1 881,809 C6_14O.2
pads on no net: J5.03 J5.05 J5.27 J5.28 J5.40 SW1.MH1 SW1.MH2
copper on no net:
  other v5: 155,1660

## Polygon pours and split planes (outlines as drawn)
JETSON_3V3 on Power Plane "JETSON_3V3_L01_P007" (solid, pour order 7): 0,40 0,1850 1310,1840 1310,1890 3110,1890 3110,40
JETSON_5V on Power Plane "JETSON_5V_L01_P004" (solid, pour order 4): 2515,550 2515,220 2415.55,120.55 2066.97,120.55 2066.97,220 2275,220 2275,370 1943,370 1943,550
JETSON_GND on Signal Layer 2 "JETSON_GND_L03_P010" (solid, pour order 10): 1310,1890 1310,1840 0,1850 5,5 3105,5 3110,1890
JETSON_GND on Signal Layer 1 "JETSON_GND_L02_P011" (solid, pour order 11): 10,1840 10,50 3100,50 3110.05,1890 1310,1890 1310,1840
JETSON_GND on GND Plane "JETSON_GND_L04_P001" (solid, pour order 1): 6.97,40 6.97,1850 1310,1840 1310,1890 3116.97,1890 3116.97,40

## Silkscreen, mask and mechanical layers (free items; w line width, h text height)
Top Overlay:
  lines w10: 310,1170 990,1170 990,1790 310,1790 310,1170
  text "UI-V1.1 / UBC Thunderbots /  / Designers: / Kenny Wakaba / Liam Bontkes /  / May 9, 2022" at 340,1190 h40
  text "MUX0" at 2383.32,997 h30
  text "CS0" at 2413.31,936 h30
  text "CS1" at 2423.31,875 h30
  text "CS2" at 2413.31,814 h30
  text "CS3" at 2413.31,753 h30
  text "CS4" at 2413.31,692 h30
  text "MUX1" at 2393.32,631 h30
  text "SCK" at 2413.31,570 h30
  text "MISO" at 2388.32,509 h30
  text "MOSI" at 2393.32,448 h30
  text "EN" at 2441.95,387 h30
  text "EN" at 1545,330 h30 r90
  text "GND" at 350,326.78 h30 r90
  text "MUX1" at 547.24,326.78 h30 r90
  text "CS4" at 645.67,326.77 h30 r90
  text "CS3" at 748.03,326.77 h30 r90
  text "CS2" at 854.33,326.78 h30 r90
  text "GND" at 1051.18,326.77 h30 r90
  text "SCK" at 1151.18,326.77 h30 r90
  text "MISO" at 1251.18,326.77 h30 r90
  text "MOSI" at 1351.18,326.78 h30 r90
  text "3V3" at 1451.18,326.78 h30 r90
  text "GND" at 1850.39,326.78 h30 r90
  text "HB" at 1944.88,326.78 h30 r90
  text "RST" at 2413.31,326 h30
  text "GND" at 2625,270 h30
  text "3V3" at 2270,245 h30
  text "3V3" at 2625,210 h30
  text "5V" at 2270,140 h30
  text "5V" at 2145,67 h25.59 r90
  text "SDO" at 345,56.74 h25.59 r90
  text "GND" at 644.6,56.74 h25.59 r90
  text "RST" at 746.96,56.74 h25.59 r90
  text "GND" at 845.39,56.74 h25.59 r90
  text "CS0" at 1144.6,56.74 h25.59 r90
  text "GND" at 1345.39,56.74 h25.59 r90
  text "GND" at 1645.99,56.74 h25.59 r90
  text "GND" at 2040,56.74 h25.59 r90
  text "CS1" at 1046.18,56.08 h25.59 r90
  text "MUX0" at 540,50 h22.13 r90
  text "RX" at 1845.39,49.98 h25.59 r90
  text "TX" at 1943.81,49.98 h25.59 r90
Bottom Overlay:
  text "GND" at 195,1230 h30 r90
  text "3V3" at 430,1230 h30 r90
  text "TX" at 250,1200 h30 r90
  text "RX" at 315,1200 h30 r90
  text "HB" at 375,1200 h30 r90
Mechanical 1:
  lines w7: 3110,39 0,39 0,1850 1305,1850 1305,2168.14 2440,2170 3110.07,1895.18 ; 3110,41 3110,1895